# Altium PCB 20K Control Board V1.1.PcbDoc (part 9 of 24)
Units mm, origin at the board's own origin, x right, y up, seen from the top; angles counter-clockwise.
Board outline 132 x 260 mm, 4 copper layers (Top Layer, GND, VCC, Bottom Layer); 1384 components, 779 nets, 4515 pads, 1774 vias.
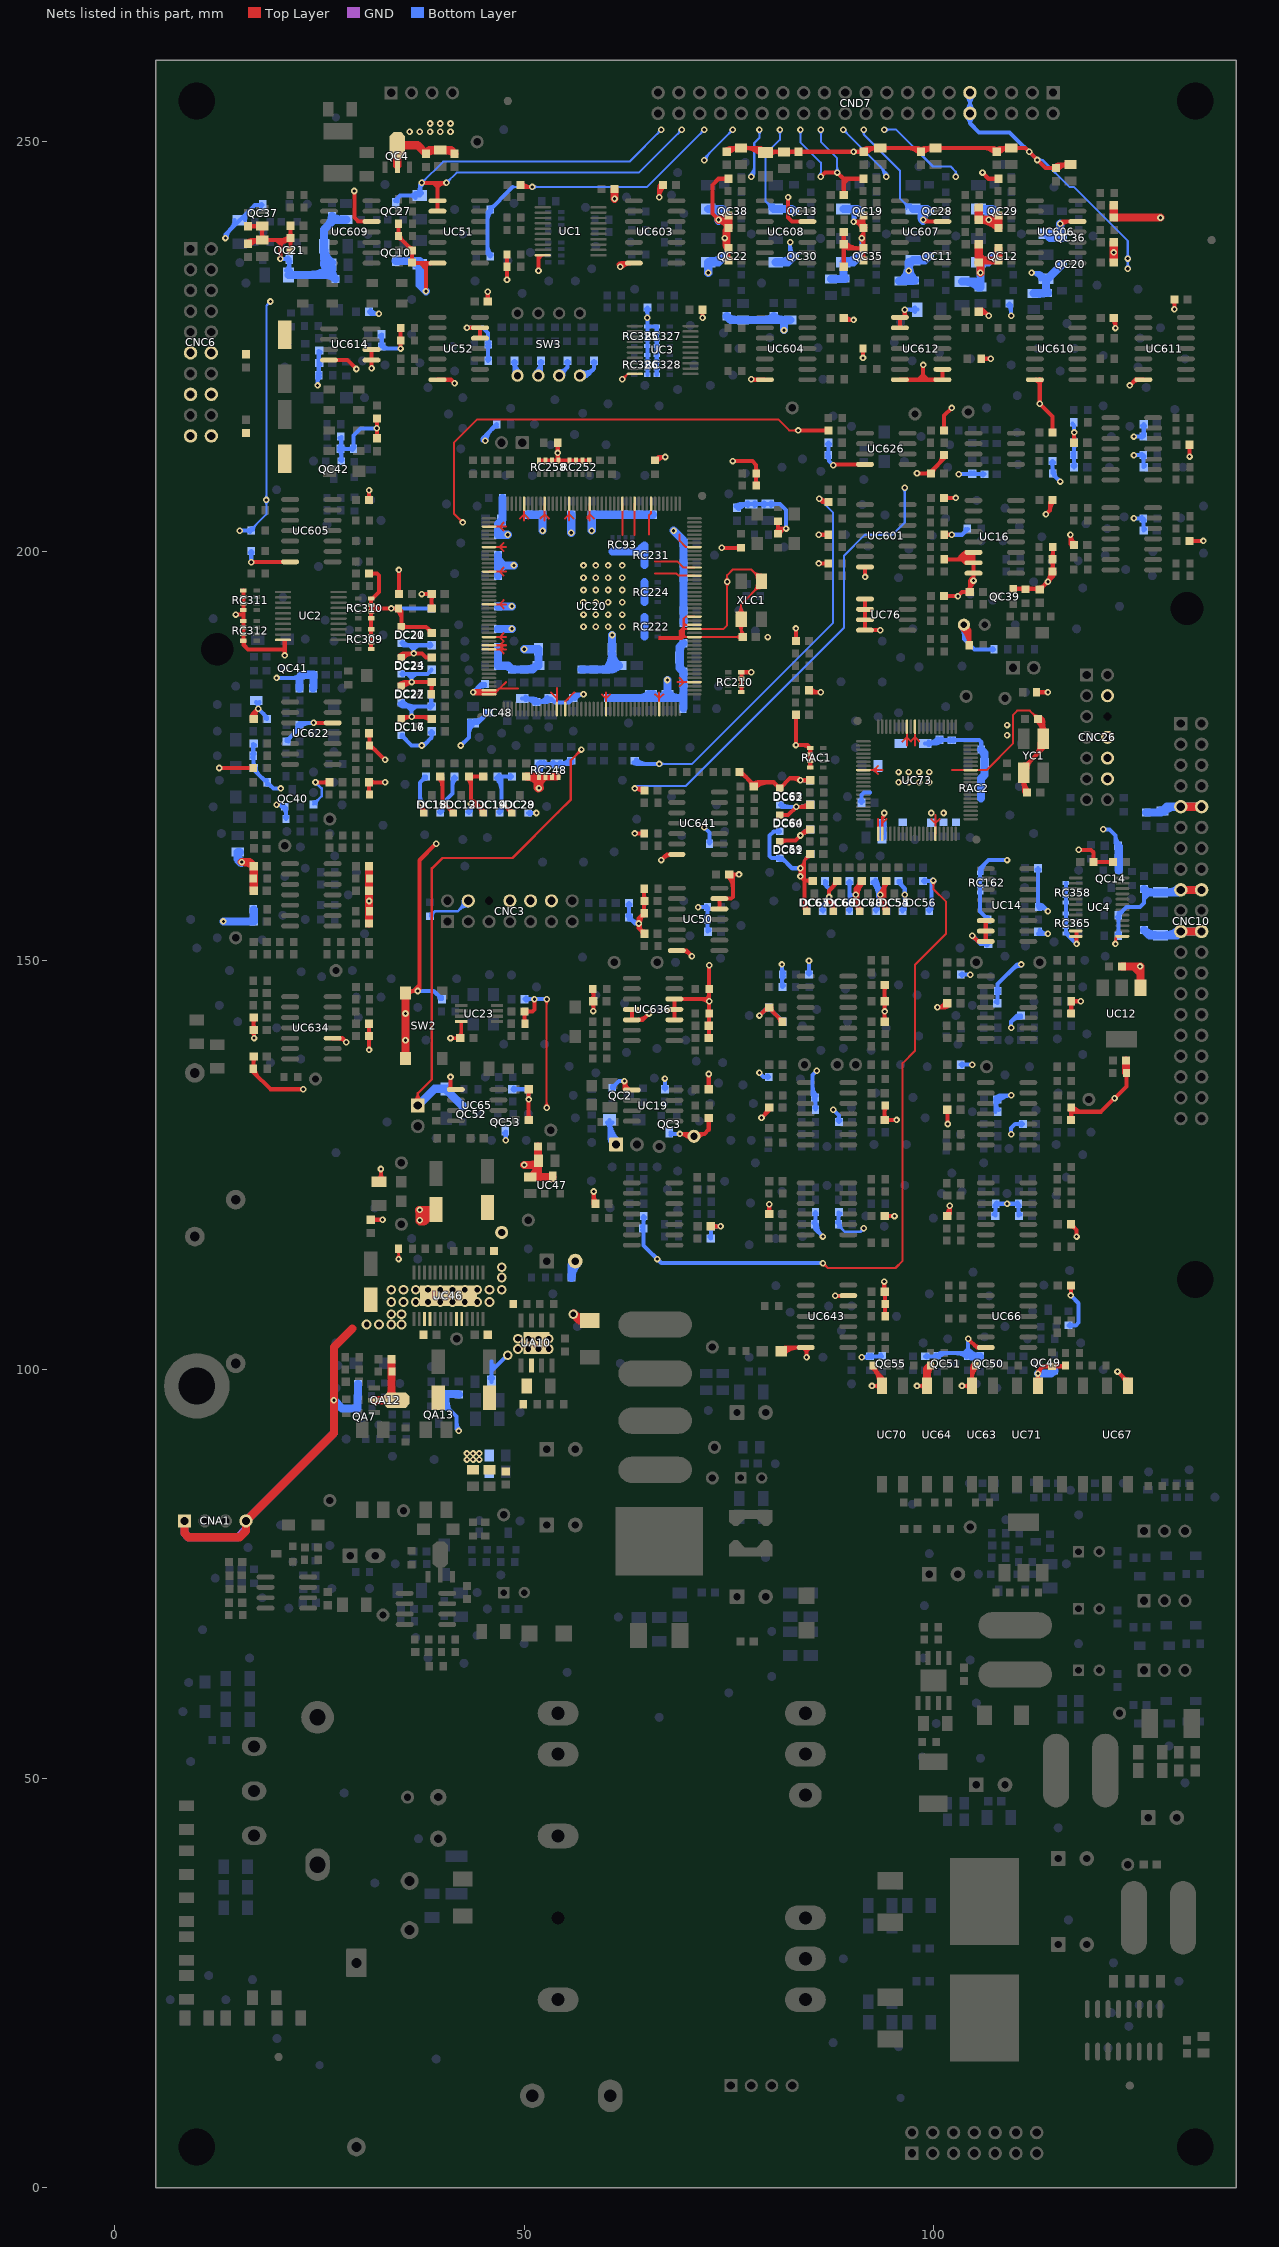
[diagram p11: the nets of this part, all layers, seen from the top]

## Via types
v1: diameter 0.8, hole 0.4, Top Layer to Bottom Layer, tented both sides, 1354 vias
v2: diameter 1.2, hole 0.7, Top Layer to Bottom Layer, 261 vias
v3: diameter 0.8, hole 0.4, Top Layer to Bottom Layer, 58 vias
v4: diameter 1.2, hole 0.7, Top Layer to Bottom Layer, tented top, 58 vias
v5: diameter 0.8, hole 0.4, Top Layer to Bottom Layer, tented top, 22 vias
v6: diameter 1.2, hole 0.7, Top Layer to Bottom Layer, tented both sides, 13 vias
v7: diameter 1.2, hole 0.7, Top Layer to Bottom Layer, tented bottom, 8 vias

## Nets (pads, with @x,y where several pads share a name; then routed paths per layer and width w, separated by ;. In a path a pad name is that pad's centre, name@x,y a point inside that pad or via, vN(x,y) a via of type N, cw(c..) or ccw(c..) an arc to the next point about the centre after c; other vN are vias at no path point) (continued)
GND: (continued)
  Bottom Layer w0.25: RC679.1@16.65,202.5 16.65,202.65 18.5,204.5 18.5,230 v1(19,230.5) ; RC679.1@16.65,202.875 ccw(c16.65,203.418) 17.034,203.034 ; RC679.1@16.975,202.55 cw(c18.001,202.55) 17.276,203.276 ; v1@18.306,206.056 cw(c17.836,205.586) 18.5,205.586 cw(c19.164,205.586) v1@18.694,206.056 ; v1@18.306,206.444 ccw(c17.836,206.914) 18.5,206.914 ccw(c19.164,206.914) v1@18.694,206.444 ; v1@18.725,230.5 cw(c18.061,230.5) 18.531,230.031 cw(c19,229.561) v1@19,230.225 ; v1(37.5,245) 40.1,247.6 62.873,247.6 66.75,251.477 v1(66.75,251.5) ; v1@37.5,245.275 ccw(c37.5,245.939) 37.969,245.469 ccw(c38.439,245) v1@37.775,245 ; v1(40.5,245) 41.75,246.25 64.023,246.25 69.25,251.477 v1(69.25,251.5) ; v1@40.5,245.275 ccw(c40.5,245.939) 40.969,245.469 ccw(c41.439,245) v1@40.775,245 ; 48.6,244.5 65.023,244.5 72,251.477 v1(72,251.5) ; v1@50.806,244.306 ccw(c50.336,243.836) 50.336,244.5 ccw(c50.336,245.164) v1@50.806,244.694 ; v1@51.194,244.306 cw(c51.664,243.836) 51.664,244.5 cw(c51.664,245.164) v1@51.194,244.694 ; RC259.1@63.426,174.276 ccw(c64.093,174.943) 64.093,174 ; v1(63.5,171) 63.8,171.3 69.734,171.3 ; RC259.1@63.5,174.4 63.9,174 70.525,174 87.75,191.225 87.75,204.7 v1(86.05,206.4) ; v1@63.518,170.982 cw(c64.285,170.215) 64.285,171.3 ; RC259.1@63.603,174.453 ccw(c64.697,175.547) 64.697,174 ; v1@63.694,170.806 cw(c64.888,169.612) 64.888,171.3 ; RC259.1@63.78,174.63 ccw(c65.3,176.15) 65.3,174 ; 66.264,250.992 ccw(c65.756,251.5) v1@66.475,251.5 ; v1@66.306,173.806 ccw(c65.836,173.336) 65.836,174 ccw(c65.836,174.664) v1@66.306,174.194 ; 66.319,251.047 cw(c66.75,250.616) v1@66.75,251.225 ; v1@66.694,173.806 cw(c67.164,173.336) 67.164,174 cw(c67.164,174.664) v1@66.694,174.194 ; 68.764,250.992 ccw(c68.256,251.5) v1@68.975,251.5 ; 68.819,251.047 cw(c69.25,250.616) v1@69.25,251.225 ; 70.217,171.783 69.734,171.3 ; 71.514,250.992 ccw(c71.006,251.5) v1@71.725,251.5 ; 71.569,251.047 cw(c72,250.616) v1@72,251.225 ; v1(72,247.75) 72,248 v1(75.5,251.5) ; v1@72.025,247.75 cw(c72.689,247.75) 72.219,248.219 ; v1@72.275,247.75 cw(c73.542,247.75) 72.646,248.646 ; v1@75.225,251.5 cw(c74.561,251.5) 75.031,251.031 cw(c75.5,250.561) v1@75.5,251.225 ; v1@77.556,245.944 ccw(c76.209,247.291) 78.113,247.291 ; v1@77.732,245.768 ccw(c76.812,246.688) 78.113,246.688 ; v1(77.75,245.75) 78.113,246.113 78.113,249.863 78.75,250.5 v1(78.75,251.5) ; v1@77.909,245.591 ccw(c77.416,246.084) 78.113,246.084 ; v1@78.556,251.306 cw(c78.086,250.836) 78.75,250.836 cw(c79.414,250.836) v1@78.944,251.306 ; 79.518,242.732 ccw(c80.5,243.713) RC357.1@80.5,242.325 ; 79.639,242.611 cw(c78.828,241.8) RC357.1@79.975,241.8 ; RC357.1@79.945,242.305 ccw(c80.5,242.86) RC357.1@80.5,242.075 ; RC357.1@80.45,241.8 79.463,242.787 79.463,248.463 81.25,250.25 v1(81.25,251.5) ; v1@81.056,251.306 cw(c80.586,250.836) 81.25,250.836 cw(c81.914,250.836) v1@81.444,251.306 ; v1@83.556,251.306 cw(c83.086,250.836) 83.75,250.836 cw(c84.414,250.836) v1@83.944,251.306 ; v1(83.75,251.5) 83.75,249.977 86.25,247.477 v1(86.25,245.75) 86.25,246.25 ; v1@86.05,206.125 cw(c86.05,205.461) 86.519,205.931 cw(c86.989,206.4) v1@86.325,206.4 ; v1@86.056,245.944 ccw(c85.586,246.414) 86.25,246.414 ccw(c86.914,246.414) v1@86.444,245.944 ; v1@86.056,251.306 cw(c85.586,250.836) 86.25,250.836 cw(c86.914,250.836) v1@86.444,251.306 ; v1@86.103,245.982 ccw(c85.933,246.25) 86.25,246.25 ; v1(86.25,251.5) 86.25,250 88.25,248 v1(88.25,246.25) v1@88.25,246.273 ; v1@86.397,245.982 cw(c86.567,246.25) 86.25,246.25 ; v1@88.056,246.444 ccw(c87.586,246.914) 88.25,246.914 ccw(c88.914,246.914) v1@88.444,246.444 ; v1@89,251.225 cw(c89,250.561) 89.469,251.031 cw(c89.939,251.5) v1@89.275,251.5 ; v1(89,251.5) 94.25,246.25 ; v1@91.323,251.29 cw(c91.003,250.909) 91.5,250.909 ; v1(91.5,251.5) 91.5,250.909 ; v1@91.677,251.29 ccw(c91.997,250.909) 91.5,250.909 ; 93.427,247.073 cw(c92.104,245.75) v1@93.975,245.75 ; 93.854,246.646 cw(c92.958,245.75) v1@94.225,245.75 ; v1(94,251.5) 94.5,251.5 ; v1@94.103,245.982 ccw(c93.933,246.25) 94.25,246.25 ; v1(94.25,245.75) 94.25,246.25 ; 94.281,246.219 cw(c93.811,245.75) v1@94.475,245.75 ; v1@94.397,245.982 cw(c94.567,246.25) 94.25,246.25 ; 94.727,251.5 94.5,251.5 ; 95.9,245.75 95.9,246.509 ; 96.268,242.732 ccw(c97.25,243.713) RC376.1@97.25,242.325 ; v1@96.306,207.556 cw(c95.836,207.086) 96.5,207.086 cw(c97.164,207.086) v1@96.694,207.556 ; 96.389,242.611 cw(c95.578,241.8) RC376.1@96.725,241.8 ; v1(96.5,207.75) 96.5,203.5 95,202 91.636,202 89.1,199.464 89.1,190.666 69.734,171.3 ; RC376.1@96.695,242.305 ccw(c97.25,242.86) RC376.1@97.25,242.075 ; RC376.1@97.2,241.8 95.9,243.1 95.9,246.509 ; v1@102.567,245.955 ccw(c102.203,246.364) 102.75,246.364 ; v1(102.75,245.75) 102.75,246.364 ; v1@102.933,245.955 cw(c103.297,246.364) 102.75,246.364 ; v1(112.707,247.793) 113.328,247.793 ; v1@112.911,247.608 cw(c113.328,247.229) 113.328,247.793 ; v1@112.911,247.977 ccw(c113.328,248.356) 113.328,247.793 ; v1@123.556,234.694 ccw(c123.086,235.164) 123.75,235.164 ccw(c124.414,235.164) v1@123.944,234.694 ; v1@123.556,235.556 cw(c123.086,235.086) 123.75,235.086 cw(c124.414,235.086) v1@123.944,235.556 ; v1@123.556,235.944 ccw(c123.086,236.414) 123.75,236.414 ccw(c124.414,236.414) v1@123.944,235.944 ; v1(123.75,234.5) 123.75,237.909 117.159,244.5 116.621,244.5 113.328,247.793 ; 91.5,250.909 95.9,246.509 ; v1@94.232,251.353 cw(c94.5,251.183) 94.5,251.5 ; v1@94.232,251.353 cw(c94.5,251.183) 94.5,251.5 ; v1@94.232,251.353 cw(c94.5,251.183) 94.5,251.5 ; v1@94.232,251.647 ccw(c94.5,251.817) 94.5,251.5 ; v1@94.232,251.647 ccw(c94.5,251.817) 94.5,251.5 ; v1@94.232,251.647 ccw(c94.5,251.817) 94.5,251.5 ; 94.5,251.5 95.454,251.5 99.954,247 102.114,247 102.75,246.364 ; 94.664,251.5 ccw(c94.664,250.836) 94.194,251.306 cw(c94.664,250.836) 94.664,251.5 ; 94.664,251.5 cw(c94.664,252.164) 94.194,251.694 ccw(c94.664,252.164) 94.664,251.5
  Bottom Layer w0.3: CC344.2@24.25,169.05 25.25,170.05 25.25,171 v1(24.5,171.75) ; CC344.2@24.25,169.4 ccw(c24.25,170.245) 24.847,169.647 ccw(c25.445,169.05) CC344.2@24.6,169.05 ; v1@24.5,171.5 cw(c24.5,170.896) 24.927,171.323 cw(c25.354,171.75) v1@24.75,171.75 ; RC283.1@38.5,155.4 39.1,156 41.9,156 CNC3.4@43.17,157.27 ; RC283.1@38.55,155.7 ccw(c38.55,156.304) 38.977,155.877 ; RC283.1@38.85,155.4 cw(c39.695,155.4) 39.097,155.997 ; CNC3.4@42.52,157.27 cw(c40.951,157.27) 42.06,156.16 cw(c43.17,155.051) CNC3.4@43.17,156.62 ; CNC3.4@42.82,157.27 cw(c41.975,157.27) 42.573,156.673 cw(c43.17,156.075) CNC3.4@43.17,156.92 ; RC179.1@88.4,117.4 cw(c88.4,116.917) RC179.1@88.741,117.259 ; RC179.1@88.4,117.75 88.4,117.6 89.175,116.825 91.075,116.825 ; RC179.1@88.7,117.7 ccw(c89.666,117.7) 88.983,117.017 ; v1@91.25,117.249 cw(c90.653,117.247) 91.075,116.825 ; v1@91.499,117 ccw(c91.497,116.403) 91.075,116.825 ; v1(91.5,117.25) 91.075,116.825
  Bottom Layer w0.4: v1(83.75,161.25) 84.25,161.75 84.25,162.25 84.95,162.95 CC408.1@84.95,163 ; v1@83.75,161.45 ccw(c83.75,161.933) 84.091,161.591 ccw(c84.433,161.25) v1@83.95,161.25 ; 84.403,162.403 ccw(c83.805,163) CC408.1@84.65,163 ; CC408.1@84.523,162.523 cw(c84.95,162.096) CC408.1@84.95,162.7
  Bottom Layer w0.5: v1(13.5,238.25) 13.5,238.7 RC390.1@15.25,240.45 17.082,242.282 QC37.3@18.035,242.282 ; v1@13.65,238.25 cw(c15.099,238.25) 14.074,239.274 ; 14.14,239.34 ccw(c13.031,240.45) RC390.1@14.6,240.45 ; v1(15.25,202.5) RC679.1@16.65,202.5 ; RC390.1@15.9,240.45 cw(c17.469,240.45) 16.36,241.56 ; RC673.1@16.509,199.809 cw(c16.167,199.467) 16.65,199.467 cw(c17.133,199.467) RC673.1@16.791,199.809 ; RC679.1@16.509,202.359 ccw(c16.167,202.017) 16.167,202.5 ccw(c16.167,202.983) RC679.1@16.509,202.641 ; v1(16.65,198.65) RC673.1@16.65,200 ; RC446.1@16.759,174.809 cw(c16.296,174.346) 16.95,174.346 ; RC446.1@16.759,175.191 ccw(c16.417,175.533) 16.9,175.533 ccw(c17.383,175.533) RC446.1@17.041,175.191 ; CC265.1@16.773,173.677 ccw(c16.346,174.104) 16.95,174.104 ccw(c17.554,174.104) CC265.1@17.127,173.677 ; RC446.1@16.9,175 CC266.1@16.9,176.45 ; 16.9,175.776 cw(c17.674,175.776) CC266.1@17.127,176.323 ; RC446.1@16.95,174.95 16.95,173.3 18.25,172 RC463.1@18.45,172 ; CC265.1@17.2,173.5 ccw(c18.286,173.5) 17.518,172.732 ; CC272.1@17.238,181.538 cw(c16.605,180.905) v1@17.5,180.905 ; v1@17.5,181.146 cw(c18.054,181.146) CC272.1@17.662,181.538 ; CC272.1@17.5,181.5 v1(17.5,180.75) 18.6,179.65 RC464.1@18.6,179.5 ; QC37.3@17.888,242.135 ccw(c17.535,241.782) 17.535,242.282 ccw(c17.535,242.782) QC37.3@17.888,242.429 ; 18.003,172.247 ccw(c18.6,172.845) RC463.1@18.6,172 ; 18.188,180.062 cw(c17.676,179.55) RC464.1@18.4,179.55 ; RC463.1@18.6,171.5 cw(c18.6,170.896) RC463.1@19.027,171.323 ; RC463.1@18.6,171.75 19.35,171 v1(20.25,171) ; v1(19.75,184.5) 22.5,184.5 QC41.1@22.75,184.75 ; v1(20.218,235.718) QC21.3@21.31,235.718 21.31,233.75 RC369.1@21.31,233.61 ; QC40.1@20.593,168.614 ccw(c19.75,167.885) v1(19.75,169) 20.5,169 20.9,168.6 RC466.1@20.9,167.25 ; QC40.1@20.603,168.603 cw(c19.888,167.888) 20.9,167.888 ; RC466.1@20.759,167.441 ccw(c20.417,167.783) 20.9,167.783 ccw(c21.383,167.783) RC466.1@21.041,167.441 ; RC369.1@20.917,234.283 ccw(c19.968,235.232) QC21.3@21.31,235.232 ; CC347.1@20.95,176.786 22.55,178.386 22.55,179 v1@24.27,179 ; CC347.1@20.95,177 ccw(c20.95,177.516) CC347.1@21.315,177.151 ; QC21.3@21.164,235.394 cw(c20.81,235.04) 21.31,235.04 cw(c21.81,235.04) QC21.3@21.457,235.394 ; QC21.3@21.164,235.571 ccw(c20.81,235.218) 20.81,235.718 ccw(c20.81,236.218) QC21.3@21.164,235.865 ; CC347.1@21.2,176.75 cw(c21.891,176.75) CC347.1@21.403,177.239 ; 21.31,234.7 ccw(c21.9,234.7) RC369.1@21.483,234.283 ; 21.646,184.5 ccw(c21.646,185.854) QC41.1@22.603,184.897 ; 21.866,177.703 ccw(c20.819,178.75) CC268.2@22.3,178.75 ; CC268.2@22.727,178.573 cw(c23.757,177.543) 23.757,179 ; 23.86,179 ccw(c23.86,179.43) v1@24.164,179.126 ; v1(24.75,220.25) RC345.2@24.75,221.4 ; v1@24.75,220.605 cw(c25.745,220.605) RC345.2@25.041,221.309 ; RC345.2@24.759,221.691 ccw(c24.417,222.033) 24.9,222.033 ccw(c25.383,222.033) RC345.2@25.041,221.691 ; RC345.2@24.9,221.5 CC198.1@24.9,224.45 ; 24.9,222.276 cw(c25.674,222.276) CC200.1@25.127,222.823 ; 24.9,223.724 ccw(c25.674,223.724) CC200.1@25.127,223.177 ; 24.9,223.776 cw(c25.674,223.776) CC198.1@25.127,224.323 ; CC286.1@27.373,212.323 cw(c26.693,211.643) 27.655,211.643 ; CC286.1@27.373,212.677 ccw(c26.693,213.357) 27.655,213.357 ; RC492.1@27.459,213.809 cw(c26.984,213.334) 27.655,213.334 ; QC42.2@27.508,211.147 ccw(c27.155,211.5) 27.655,211.5 ccw(c28.155,211.5) QC42.2@27.802,211.147 ; QC42.2@27.655,211 CC286.1@27.655,212.5 ; RC492.1@27.655,213.945 CC286.1@27.655,212.5 ; CC286.1@27.727,212.323 cw(c28.154,211.896) 28.154,212.5 cw(c28.154,213.104) CC286.1@27.727,212.677 ; RC498.1@29.009,212.359 ccw(c28.667,212.017) 28.667,212.5 ccw(c28.667,212.983) RC498.1@29.009,212.641 ; RC498.1@29.009,212.691 ccw(c28.667,213.033) 29.15,213.033 ccw(c29.633,213.033) RC498.1@29.291,212.691 ; CC202.1@31.05,229.25 31.3,229 v1(32.25,229) cw(c32.25,230.44) CC202.1@31.228,229.426 ; v1(32,215) 30,215 29.15,214.15 RC498.1@29.15,212.5 CC286.1@27.655,212.5 ; CC196.2@32.373,226.323 cw(c31.826,225.776) 32.6,225.776 ; RC330.1@32.459,225.191 ccw(c32.117,225.533) 32.6,225.533 ccw(c33.083,225.533) RC330.1@32.741,225.191 ; RC330.1@32.6,225 CC196.2@32.6,226.45 ; RC330.1@32.741,225.091 ccw(c33.566,225.916) 33.566,224.75 ; RC330.1@32.85,224.75 v1(34.9,224.75) ; v1(33.75,193) RC227.2@38.65,193 ; QC27.3@34.2,242.81 34.84,243.45 RC379.1@37.25,243.45 37.25,244.75 v1(37.5,245) ; QC27.3@34.492,242.71 cw(c35.439,242.71) 34.769,243.379 ; DC22.1@34.749,181.349 ccw(c35.366,181.72) 35.366,181 ; DC22.1@34.793,181.293 ccw(c35.5,182) 35.5,181 ; DC16.1@35,177.293 cw(c35,176.793) 35.354,177.146 cw(c35.707,177.5) DC16.1@35.207,177.5 ; DC16.1@35,177.5 36.25,176.25 37.75,176.25 38.7,177.2 CC144.1@38.7,178 ; DC22.1@35,181.5 35.5,181 ; DC23.1@35,185 38.2,185 CC156.1@38.7,185.5 ; DC21.1@35,188.75 35.25,188.5 CC153.1@38.7,188.5 ; DC22.1@35.147,181.647 ccw(c36.707,183.207) 36.707,181 ; DC23.1@35.147,184.853 cw(c35.5,184.5) 35.5,185 cw(c35.5,185.5) DC23.1@35.147,185.147 ; DC21.1@35.147,188.897 ccw(c36.104,189.854) 36.104,188.5 ; DC22.1@35.178,181.607 ccw(c36.25,182.251) 36.25,181 ; 35.75,181 36.25,180.5 ; 35.75,185 36.25,184.5 ; 36,188.5 36.5,188 ; v1(36.25,179.75) 36.25,180.5 ; v1(36.25,184) 36.25,184.5 ; 36.25,185 36.25,184.5 ; v1(36.5,187.5) 36.5,188 ; 36.5,188.5 36.5,188 ; RC379.1@36.717,243.167 ccw(c36.034,242.484) 36.034,243.45 ccw(c36.034,244.416) RC379.1@36.717,243.733 ; 36.75,181 36.25,180.5 ; 36.75,185 36.25,184.5 ; RC379.1@36.967,243.733 ccw(c36.284,244.416) 37.25,244.416 ccw(c38.216,244.416) RC379.1@37.533,243.733 ; v1(37,146.25) 38.95,146.25 CC170.1@39.95,145.25 ; 37,188.5 36.5,188 ; 37.25,170.121 ccw(c38.466,170.121) v1@37.606,169.261 ; RC379.1@37.25,244.034 cw(c38.466,244.034) v1@37.606,244.894 ; v1(37.5,169.155) 37.25,169.405 37.25,171.7 CC145.1@38,172.45 ; v1@37.5,176.4 ccw(c37.5,177.366) 38.183,176.683 ; v1(37.5,194.75) CC136.1@38.7,194.75 ; CC145.1@37.75,172.45 cw(c37.146,172.45) 37.573,172.023 cw(c38,171.596) CC145.1@38,172.2 ; RC235.1@38.509,182.309 cw(c38.167,181.967) 38.65,181.967 cw(c39.133,181.967) RC235.1@38.791,182.309 ; RC227.2@38.509,192.859 ccw(c38.167,192.517) 38.167,193 ccw(c38.167,193.483) RC227.2@38.509,193.141 ; CC144.1@38.523,177.823 cw(c38.096,177.396) 38.7,177.396 cw(c39.304,177.396) CC144.1@38.877,177.823 ; CC165.1@38.523,180.823 ccw(c38.096,180.396) 38.096,181 ccw(c38.096,181.604) CC165.1@38.523,181.177 ; CC153.1@38.523,188.323 ccw(c38.096,187.896) 38.096,188.5 ccw(c38.096,189.104) CC153.1@38.523,188.677 ; CC136.1@38.523,194.573 ccw(c38.096,194.146) 38.096,194.75 ccw(c38.096,195.354) CC136.1@38.523,194.927 ; 38.65,181.724 ccw(c39.424,181.724) CC165.1@38.877,181.177 ; RC235.1@38.65,182.5 38.65,181.05 CC165.1@38.7,181 35.5,181 ; DC18.1@39.603,168.147 ccw(c38.646,169.104) v1@40,169.104 ; CC170.1@39.7,145.25 ccw(c39.096,145.25) 39.523,145.677 ccw(c39.95,146.104) CC170.1@39.95,145.5 ; DC18.1@39.75,168 40,168.25 v1(40,169.155) 41.25,170.405 41.25,172.2 CC132.1@41.5,172.45 ; QA13.1@40.5,95.293 cw(c40.5,94.793) 40.854,95.146 cw(c41.207,95.5) QA13.1@40.707,95.5 ; QA13.1@40.5,95.5 41.75,94.25 41.75,92.75 v1(42,92.5) ; 41.25,171.243 cw(c42.707,171.243) CC132.1@41.677,172.273 ; 41.75,93.466 ccw(c42.966,93.466) v1@42.106,92.606 ; v1(42.25,176.25) 43.25,177.25 43.25,179 44.325,179 UC48.3@45.575,180.25 ; v1(43,227.29) 44.96,227.29 45.6,226.65 RC28.2@45.6,225.25 RC531.1@45.6,223.25 ; DC13.1@43.103,168.147 ccw(c42.146,169.104) v1@43.5,169.104 ; DC13.1@43.25,168 43.5,168.25 v1(43.5,169.155) ; 43.25,177.551 cw(c44.999,177.551) CC302.2@43.762,178.788 ; CC302.2@43.25,179.25 CC302.2@43.5,179.25 ; v1(43.75,182.75) 44.75,183.75 CC159.1@45.2,183.75 ; CC302.2@43.95,179.3 ccw(c43.95,180.93) 45.102,179.777 ; v1@44.005,183.005 cw(c45.2,181.81) CC159.1@45.2,183.5 ; v1@44.9,213.5 cw(c45.504,213.5) 45.077,213.927 ; 44.918,179.593 ccw(c44.261,180.25) UC48.3@45.19,180.25 ; v1(45.25,213.5) 45.25,214.1 RC207.1@46.65,215.5 ; v1@45.4,213.5 cw(c47.211,213.5) 45.93,214.78 ; RC531.1@45.459,223.441 ccw(c45.117,223.783) 45.6,223.783 ; RC28.2@45.459,225.059 cw(c45.117,224.717) 45.6,224.717 cw(c46.083,224.717) RC28.2@45.741,225.059 ; RC28.2@45.459,225.441 ccw(c45.117,225.783) 45.6,225.783 ccw(c46.083,225.783) RC28.2@45.741,225.441 ; 45.5,237.378 ccw(c47.178,237.378) RC528.1@45.991,236.191 ; 45.5,240.372 cw(c47.178,240.372) RC527.1@45.991,241.559 ; 45.6,223.783 ccw(c46.083,223.783) RC531.1@45.741,223.441 ; CA121.1@45.788,98.912 ccw(c45.276,99.424) 46,99.424 ccw(c46.724,99.424) CA121.1@46.212,98.912 ; RC528.1@45.85,236 45.5,236.35 45.5,241.4 48.6,244.5 ; RC527.1@45.85,242 ccw(c45.85,242.604) RC527.1@46.277,242.177 ; CA121.1@46,98.5 46,99.8 ; 46,101 46,100.25 ; RC207.1@46.223,215.073 cw(c46.65,214.646) RC207.1@46.65,215.25 ; 46.25,100.5 46,100.25 ; CC149.1@46.573,172.273 cw(c44.939,170.639) 47.25,170.639 ; CC149.1@46.75,172.45 CC167.1@48.5,172.45 ; DC14.1@46.853,168.147 ccw(c45.896,169.104) v1@47.25,169.104 ; CC149.1@46.927,172.273 cw(c47.354,171.846) 47.354,172.45 cw(c47.354,173.054) 46.927,172.627 cw(c46.146,171.846) 47.25,171.846 ; DC14.1@47,168 47.25,168.25 v1(47.25,169.155) CC149.1@47.25,172.45 ; QC53.3@47.569,128.894 cw(c47.131,128.456) 47.75,128.456 ; v1(47.75,128) QC53.3@47.75,129.067 ; v4(48,101.75) 47.95,101.75 46,99.8 ; CC167.1@48.323,172.273 ccw(c47.896,171.846) 47.896,172.45 ccw(c47.896,173.054) CC167.1@48.323,172.627 ; CC398.2@48.55,134.25 50,134.25 50.55,133.7 v1(50.55,133) ; CC174.1@48.623,223.073 cw(c48.196,222.646) 48.8,222.646 cw(c49.404,222.646) CC174.1@48.977,223.073 ; CC398.2@48.727,134.073 cw(c49.154,133.646) 49.154,134.25 cw(c49.154,134.854) CC398.2@48.727,134.427 ; SW3.1@48.8,221.83 CC174.1@48.8,223.25 ccw(c50.585,223.25) SW3.1@49.495,221.836 ; 48.8,222.233 ccw(c49.801,222.233) SW3.1@49.19,221.44 ; CC138.1@49.75,182 51.05,182 CC301.2@51.5,181.55 ; CC138.1@49.81,182 cw(c49.81,179.86) CC301.2@51.323,181.373 ; CC169.1@50.05,145.25 v1(52.75,145.25) ; CC138.1@50.162,181.788 cw(c50.674,181.276) 50.674,182 cw(c50.674,182.724) CC138.1@50.162,182.212 ; CC169.1@50.227,145.073 cw(c50.654,144.646) 50.654,145.25 cw(c50.654,145.854) CC169.1@50.227,145.427 ; DC29.1@50.5,168 v1(51.5,168) ; DC29.1@50.647,167.853 cw(c51,167.5) 51,168 cw(c51,168.5) DC29.1@50.647,168.147 ; CC301.2@51.017,182 cw(c51.017,181.067) 51.677,181.727 ccw(c52.104,182.154) 52.104,181.55 ccw(c52.104,180.946) CC301.2@51.677,181.373 ; SW3.2@51.4,221.816 ccw(c50.143,223.25) CC173.1@52.05,223.25 52.05,221.76 SW3.2@51.73,221.44 ccw(c51.111,222.146) 52.05,222.146 ; CC173.1@51.873,223.073 cw(c51.446,222.646) 52.05,222.646 cw(c52.654,222.646) CC173.1@52.227,223.073 ; CC150.1@52.412,173.788 cw(c52.924,173.276) 52.924,174 cw(c52.924,174.724) CC150.1@52.412,174.212 ; CC147.1@52.533,181.55 ccw(c52.533,182.409) CC147.1@53.207,181.876 ; 52.75,174 55.5,174 RC247.1@55.9,174.4 ; CC147.1@52.75,182 CC147.1@53.25,182 ; CC147.1@52.815,182.186 cw(c51.5,183.227) CC301.2@51.5,181.55 ; CC151.1@53.588,173.788 ccw(c53.076,173.276) 53.076,174 ccw(c53.076,174.724) CC151.1@53.588,174.212 ; CC151.1@54.251,174 ccw(c54.251,175.849) RC247.1@55.559,174.541 ; SW3.3@54.27,221.44 55.3,222.47 CC172.1@55.3,223.25 ; SW3.3@54.27,221.94 ccw(c54.27,223.147) 55.124,222.294 ccw(c55.977,221.44) SW3.3@54.77,221.44 ; CC151.1@54.412,173.788 cw(c54.924,173.276) 54.924,174 cw(c54.924,174.724) CC151.1@54.412,174.212 ; CC172.1@55.123,223.073 cw(c54.696,222.646) 55.3,222.646 cw(c55.904,222.646) CC172.1@55.477,223.073 ; RC247.1@55.459,174 ccw(c55.459,174.641) RC247.1@55.912,174.188 ; CC121.2@55.787,182.181 cw(c56.357,181.831) CC121.2@56.357,182.5 ; CC121.2@56.213,181.919 cw(c57.25,181.284) v1(57.25,182.5) 56.45,182.5 CC121.2@56,182.05 55.45,181.5 53.75,181.5 CC147.1@53.25,182 ; SW3.4@56.963,221.916 ccw(c57.442,223.408) 58.55,222.3 ; SW3.4@57.24,221.184 cw(c57.69,220.916) 57.69,221.44 ; SW3.4@57.24,221.696 ccw(c57.69,221.964) 57.69,221.44 ; 57.971,221.721 cw(c57.16,222.531) SW3.4@56.81,221.44 57.69,221.44 ; CC171.1@58.373,223.073 cw(c57.946,222.646) 58.55,222.646 cw(c59.154,222.646) CC171.1@58.727,223.073 ; CC171.1@58.55,223.25 58.55,222.3 ; DC11.1@60.132,130.182 cw(c59.364,129.414) 60.45,129.414 cw(c61.536,129.414) DC11.1@60.768,130.182 ; CNC1.1@60.45,128.326 ccw(c61.938,128.326) CNC1.1@60.97,127.196 ; 60.45,129.413 ccw(c62.869,129.413) CNC1.1@61.295,127.576 ; QC2.2@60.75,134.405 61.595,135.25 v1(62.25,135.25) ; QC2.2@60.75,134.612 ccw(c60.75,135.112) 61.104,134.759 ccw(c61.457,134.405) QC2.2@60.957,134.405 ; CNC1.1@61.23,127.5 60.45,128.28 DC11.1@60.45,130.5 ccw(c63.801,130.5) CNC1.1@61.62,127.956 ; CC175.1@62.623,155.427 ccw(c62.196,155.854) 62.8,155.854 ccw(c63.404,155.854) CC175.1@62.977,155.427 ; CC176.1@62.623,156.823 cw(c62.196,156.396) 62.8,156.396 cw(c63.404,156.396) CC176.1@62.977,156.823 ; CC175.1@62.8,155 cw(c62.8,154.396) 63.227,154.823 cw(c63.654,155.25) CC175.1@63.05,155.25 ; CC176.1@62.8,157 CC175.1@62.8,155.25 63.55,154.5 v1(64,154.5) ; CC175.1@63.025,155.025 ccw(c63.934,155.934) v1@63.993,154.65 ; RC259.1@63.338,174.188 ccw(c63.791,174.641) RC259.1@63.791,174 ; RC259.1@63.691,174.541 ccw(c64.999,175.849) 64.999,174 ; RC259.1@63.9,174 v1(66.5,174) ; CC2.1@64.373,117.073 cw(c63.826,116.526) 64.6,116.526 ; CC2.1@64.373,117.427 ccw(c63.826,117.974) 64.6,117.974 ; RC5.2@64.459,118.559 cw(c64.117,118.217) 64.6,118.217 cw(c65.083,118.217) RC5.2@64.741,118.559 ; RC5.2@64.6,118.75 64.6,115.15 66.75,113 v1(86.5,113) ; CC185.2@64.873,229.573 cw(c64.446,229.146) 65.05,229.146 cw(c65.654,229.146) CC185.2@65.227,229.573 ; RC326.8@65.05,221.55 RC326.7@65.05,222.35 RC326.6@65.05,223.15 RC326.5@65.05,223.95 RC325.8@65.05,225.05 RC325.7@65.05,225.85 RC325.6@65.05,226.65 RC325.5@65.05,227.45 ; CC185.2@65.05,229.75 RC325.5@65.05,227.45 ; RC328.5@66.2,221.55 RC328.6@66.2,222.35 RC328.7@66.2,223.15 RC328.8@66.2,223.95 RC327.5@66.2,225.05 RC327.6@66.2,225.85 RC327.7@66.2,226.65 RC327.8@66.2,227.45 RC325.5@65.05,227.45 ; CC106.2@67.023,134.427 ccw(c66.596,134.854) 67.2,134.854 ccw(c67.804,134.854) CC106.2@67.377,134.427 ; CC106.2@67.2,134.25 v1(67.2,135.55) ; QC3.3@67.862,128.644 cw(c68.196,128.31) 68.196,128.782 ; QC3.3@67.862,128.937 ccw(c68.235,129.31) 68.235,128.782 ; QC3.3@67.965,128.968 68.151,128.782 v1(69.032,128.782) ; v1(71.25,156.5) RC43.1@72.4,156.5 CC48.2@72.4,153.55 ; v1(72,166.25) 72.65,165.6 RC686.1@72.65,164.25 ; RC535.1@72.259,154.809 cw(c71.917,154.467) 72.4,154.467 cw(c72.883,154.467) RC535.1@72.541,154.809 ; RC535.1@72.259,155.191 ccw(c71.917,155.533) 72.4,155.533 ccw(c72.883,155.533) RC535.1@72.541,155.191 ; RC43.1@72.259,156.309 cw(c71.917,155.967) 72.4,155.967 cw(c72.883,155.967) RC43.1@72.541,156.309 ; RC43.1@72.259,156.359 ccw(c71.917,156.017) 71.917,156.5 ccw(c71.917,156.983) RC43.1@72.259,156.641 ; 72.4,154.224 ccw(c73.174,154.224) CC48.2@72.627,153.677 ; RC686.1@72.509,164.441 ccw(c72.167,164.783) 72.65,164.783 ccw(c73.133,164.783) RC686.1@72.791,164.441 ; CC85.1@72.623,116.177 ccw(c72.076,116.724) 72.85,116.724 ; RC165.1@72.709,117.309 cw(c72.367,116.967) 72.85,116.967 cw(c73.333,116.967) RC165.1@72.991,117.309 ; CC85.1@72.8,116 72.85,116.05 RC165.1@72.85,117.5 v1(74,117.5) ; RC165.1@72.991,117.359 cw(c73.333,117.017) 73.333,117.5 cw(c73.333,117.983) RC165.1@72.991,117.641 ; CC249.1@75.823,205.477 cw(c76.483,204.817) CC249.1@76.483,205.75 ; CC249.1@76,205.3 76.45,205.75 CC248.1@79.75,205.75 81.25,205.75 82,205 v1(82,202.75) ; CC249.1@76.177,205.123 cw(c77.69,203.61) CC349.1@77.69,205.75 ; CC349.1@77.338,205.538 ccw(c76.826,205.026) 76.826,205.75 ccw(c76.826,206.474) CC349.1@77.338,205.962 ; CC349.1@78.162,205.538 cw(c78.674,205.026) 78.674,205.75 cw(c78.674,206.474) CC349.1@78.162,205.962 ; v1(78.75,136.25) 79.25,135.75 RC83.1@79.9,135.75 ; v1(78.75,143.25) RC150.1@79.75,144.25 ; 79.217,143.717 cw(c79.9,143.034) 79.9,144 cw(c79.9,143.517) 80.241,143.859 cw(c80.583,144.2) RC150.1@80.1,144.2 ; CC248.1@79.338,205.538 ccw(c78.826,205.026) 78.826,205.75 ccw(c78.826,206.474) CC248.1@79.338,205.962 ; RC83.1@79.759,135.609 ccw(c79.417,135.267) 79.417,135.75 ccw(c79.417,136.233) RC83.1@79.759,135.891 ; RC150.1@79.9,144.1 RC150.1@79.9,144.2 ; RC150.1@79.9,144.5 RC150.1@79.9,144.25 RC150.1@79.9,144.2 ; CC248.1@80.162,205.538 cw(c80.674,205.026) 80.674,205.75 cw(c80.674,206.474) CC248.1@80.162,205.962 ; DC61.1@81.103,162.353 ccw(c80.75,162) 80.75,162.5 ccw(c80.75,163) DC61.1@81.103,162.647 ; DC60.1@81.103,165.603 ccw(c80.75,165.25) 80.75,165.75 ccw(c80.75,166.25) DC60.1@81.103,165.897 ; RC144.2@81.173,142.927 ccw(c81.6,143.354) RC144.2@81.6,142.75 ; DC61.1@81.25,162.293 cw(c81.25,161.189) 82.03,161.97 ; DC60.1@81.25,165.75 80.5,165.75 80,165.25 80,162.75 80.25,162.5 DC61.1@81.25,162.5 81.5,162.5 82.75,161.25 v1(83.75,161.25) ; DC62.1@81.25,169 81.5,168.75 v1(83.25,168.75) 84.7,168.75 CC417.1@84.95,169 ; DC62.1@81.397,169.147 ccw(c82.354,170.104) 82.354,168.75 ; CC64.1@81.5,146.8 v1(81.5,149.5) ; 81.5,147.474 ccw(c82.274,147.474) CC64.1@81.727,146.927 ; 81.5,147.476 cw(c82.324,147.476) RC133.1@81.741,148.059 ; 81.5,149.024 ccw(c82.324,149.024) RC133.1@81.741,148.441 ; CC64.1@81.55,146.75 CC64.1@81.55,146.8 ; RC144.2@81.6,142.5 RC150.1@79.9,144.2 ; 82.25,242.253 v1(82.25,243.25) ; 82.5,237.236 ccw(c83.991,237.236) QC30.3@82.937,236.181 ; v1(82.5,237.75) 82.5,236.503 QC30.3@82.968,236.035 ; 83.743,168.75 ccw(c83.743,170.207) CC417.1@84.773,169.177 ; v1(83.75,165.25) 84.25,165.75 ; v1(83.75,172) RC693.2@84.9,172 ; v1@83.755,165.255 cw(c84.95,164.06) CC406.1@84.95,165.75 ; v1@84.025,165.525 cw(c84.659,164.891) CC406.1@84.887,165.758 ; CC57.1@84.623,148.427 ccw(c84.196,148.854) 84.8,148.854 ccw(c85.404,148.854) CC57.1@84.977,148.427 ; CC406.1@84.7,165.75 84.25,165.75 ; CC406.1@84.714,166.081 cw(c84.25,166.24) 84.25,165.75 ; RC693.2@84.759,171.859 ccw(c84.417,171.517) 84.417,172 ccw(c84.417,172.483) RC693.2@84.759,172.141 ; CC57.1@84.8,148.25 v1(84.8,149.95) ; 85.25,134.578 ccw(c86.878,134.578) CC54.2@85.727,133.427 ; CC38.1@85.373,117.927 ccw(c84.826,118.474) 85.6,118.474 ; CC54.2@85.373,133.073 cw(c84.826,132.526) 85.6,132.526 ; RC66.2@85.459,119.059 cw(c85.117,118.717) 85.6,118.717 cw(c86.083,118.717) RC66.2@85.741,119.059 ; RC101.2@85.459,131.941 ccw(c85.117,132.283) 85.6,132.283 ccw(c86.083,132.283) RC101.2@85.741,131.941 ; CC38.1@85.55,117.75 85.55,117.2 v1(86.5,116.25) ; CC54.2@85.55,133.25 85.25,133.55 85.25,136 v1(85.75,136.5) ; CC38.1@85.6,117.8 RC66.2@85.6,119.25 ; RC101.2@85.6,131.75 CC54.2@85.6,133.2 ; CC38.1@85.799,117.724 ccw(c87.273,117.573) v1@86.225,116.525 ; DC65.1@86.353,156.147 ccw(c86,156.5) 86.5,156.5 ccw(c87,156.5) DC65.1@86.647,156.147 ; DC65.1@86.5,156 86.5,156.75 87.25,157.5 87.25,158.75 86.75,159.25 CC422.1@86.75,159.7 ; 86.817,157.067 ccw(c86.134,157.75) v1@87.1,157.75 ; CC422.1@86.961,159.565 ccw(c87.36,159.31) 87.025,158.975 ; RC124.2@87.009,211.941 ccw(c86.546,212.404) 87.2,212.404 ; RC124.2@87.011,211.556 cw(c86.467,210.993) 87.25,210.993 ; CC65.1@87.023,213.073 cw(c86.596,212.646) 87.2,212.646 cw(c87.804,212.646) CC65.1@87.377,213.073 ; RC124.2@87.15,211.75 87.25,211.65 87.25,211 v1(87.75,210.5) ; RC124.2@87.2,211.8 CC65.1@87.2,213.25 ; v1(87.75,131.75) 88.45,131.05 CC68.2@88.45,130.25 ; RC179.1@88.259,117.941 ccw(c87.917,118.283) 88.4,118.283 ccw(c88.883,118.283) RC179.1@88.541,117.941 ; CC68.2@88.273,130.427 ccw(c87.846,130.854) 88.45,130.854 ccw(c89.054,130.854) CC68.2@88.627,130.427 ; RC179.1@88.4,117.75 CC96.1@88.4,119.2 ; 88.4,118.526 cw(c89.174,118.526) CC96.1@88.627,119.073 ; CC428.1@89.573,159.523 cw(c89.146,159.096) 89.75,159.096 cw(c90.354,159.096) CC428.1@89.927,159.523 ; DC69.1@89.603,156.147 ccw(c89.25,156.5) 89.75,156.5 ccw(c90.25,156.5) DC69.1@89.897,156.147 ; DC69.1@89.75,156 CC428.1@89.75,159.7 ; 89.75,158 v1(90.5,158) ; v1@90.25,240.141 cw(c91.716,240.141) QC19.3@90.905,241.362 ; v1(90.25,240.25) 90.25,241.347 ; 90.25,241.073 cw(c91.097,241.073) QC19.3@90.628,241.779 ; QC35.3@90.999,236.181 ccw(c90.394,236.787) 91.25,236.787 ; CC437.2@91.023,169.427 ccw(c90.596,169.854) 91.2,169.854 ccw(c91.804,169.854) CC437.2@91.377,169.427 ; CC437.2@91.2,169.25 91.2,170.2 91.5,170.5 92.25,170.5 ; v1(91.25,101.5) RC652.1@92.15,101.5 ; QC35.3@91.25,236.317 v1(91.25,238.25) ; v1@91.476,101.5 ccw(c91.476,102.324) RC652.1@92.059,101.741 ; RC652.1@92.25,101.6 QC55.2@93.695,101.6 ; RC652.1@92.441,101.459 cw(c92.783,101.117) 92.783,101.6 cw(c92.783,102.083) RC652.1@92.441,101.741 ; CC429.1@92.573,159.523 cw(c90.939,157.889) v1@93.25,157.889 ; CC429.1@92.65,159.6 93.25,159 ; CC429.1@92.716,159.452 cw(c92.632,158.84) 93.25,158.84 ; DC70.1@92.853,156.147 ccw(c91.896,157.104) 93.25,157.104 ; CC429.1@92.927,159.877 cw(c92.146,159.096) 93.25,159.096 ; DC70.1@93,156 93.25,156.25 93.25,159 ; CC429.1@93,159.7 ccw(c94.086,159.7) 93.318,158.932 ; 93.117,101.6 ccw(c93.117,102.288) QC55.2@93.603,101.802 ; 93.25,157 93.5,157.25 v1(93.5,158) 93.5,158.75 93.25,159 ; 93.25,157.034 cw(c94.466,157.034) v1@93.606,157.894 ; 93.25,158.966 ccw(c94.466,158.966) v1@93.606,158.106 ; CC395.1@95.75,159.7 95.75,159.5 96.5,158.75 96.5,156.25 DC55.1@96.25,156 ; CC395.1@96,159.7 ccw(c97.086,159.7) 96.318,158.932 ; DC55.1@96.103,156.147 ccw(c95.146,157.104) 96.5,157.104 ; v1(96.5,229.5) CC207.2@98.05,229.5 ; CC207.2@97.767,229.217 ccw(c97.084,228.534) 97.084,229.5 ccw(c97.084,230.466) CC207.2@97.767,229.783 ; CC399.1@98.75,159.7 v1@99.95,159.7 ; CC399.1@98.927,159.523 cw(c99.354,159.096) 99.354,159.7 cw(c99.354,160.304) CC399.1@98.927,159.877 ; RC613.1@99,101.6 QC51.2@100.445,101.6 ; CC445.1@99,176.5 100.3,176.5 CC424.1@100.75,176.95 ; CC445.1@99.06,176.5 ccw(c99.06,178.64) CC424.1@100.573,177.127 ; RC613.1@99.191,101.459 cw(c99.533,101.117) 99.533,101.6 cw(c99.533,102.083) RC613.1@99.191,101.741 ; DC56.1@99.353,156.147 ccw(c98.396,157.104) 99.75,157.104 ; CC445.1@99.412,176.288 cw(c99.924,175.776) 99.924,176.5 cw(c99.924,177.224) CC445.1@99.412,176.712 ; DC56.1@99.5,156 99.75,156.25 v1@99.75,159.5 ; 99.517,159.7 ccw(c99.517,160.233) v1@99.894,159.856 ; 99.75,158.784 cw(c100.966,158.784) v1@100.106,159.644 ; 99.867,101.6 ccw(c99.867,102.288) QC51.2@100.353,101.802 ; CC424.1@100.267,176.5 ccw(c100.267,177.433) CC424.1@100.927,176.773 ; QC51.2@100.5,101.655 100.845,102 103.85,102 RC612.1@104.25,101.6 104.25,102.5 ; QC51.2@100.647,101.508 cw(c101.833,100.322) 101.833,102 ; CC424.1@100.8,176.9 RC653.2@102.25,176.9 105.6,176.9 105.85,176.65 RC515.2@105.85,175.75 ; CC424.1@100.927,177.127 ccw(c101.474,177.674) 101.474,176.9 ; RC653.2@102.059,176.759 ccw(c101.717,176.417) 101.717,176.9 ccw(c101.717,177.383) RC653.2@102.059,177.041 ; v1(102.25,202) 103.5,202 RC194.2@104.2,202.7 ; RC653.2@102.441,176.759 cw(c102.783,176.417) 102.783,176.9 cw(c102.783,177.383) RC653.2@102.441,177.041 ; 102.751,102 cw(c102.751,100.151) RC612.1@104.059,101.459 ; v1(103.1,209.4) RC103.2@106.25,209.4 ; RC9.1@103.35,137.25 v1(104.75,137.25) ; RC13.1@103.35,148.25 v1(104.5,148.25) ; NTCC1.2@103.376,190.646 cw(c102.523,189.793) 103.73,189.793 cw(c104.937,189.793) NTCC1.2@104.084,190.646 ; RC9.1@103.491,137.109 cw(c103.833,136.767) 103.833,137.25 cw(c103.833,137.733) RC9.1@103.491,137.391 ; RC13.1@103.491,148.109 cw(c103.833,147.767) 103.833,148.25 cw(c103.833,148.733) RC13.1@103.491,148.391 ; NTCC1.2@103.73,191 103.73,189.27 105,188 RC629.1@107.4,188 ; RC612.1@103.75,102 104.25,102.5 ; RC194.2@103.773,202.273 ccw(c103.346,202.7) RC194.2@103.95,202.7 ; RC612.1@103.959,102 cw(c103.959,101.359) RC612.1@104.412,101.812 ; 104.026,209.4 ccw(c104.026,210.174) CC49.1@104.573,209.627 ; CND7.10@104.063,253.887 ccw(c103.082,254.868) 104.47,254.868 ccw(c105.858,254.868) CND7.10@104.877,253.887 ; CND7.9@104.063,255.613 cw(c103.082,254.632) 104.47,254.632 cw(c105.858,254.632) CND7.9@104.877,255.613 ; RC612.1@104.109,101.741 ccw(c103.767,102.083) 104.25,102.083 ccw(c104.733,102.083) RC612.1@104.391,101.741 ; CND7.10@104.11,253.032 cw(c103.505,252.28) 104.47,252.28 ; RC612.1@104.186,101.877 cw(c104.486,101.148) 105.044,101.706 ; v1(104.25,103.75) 104.25,102.5 ; CND7.9@104.47,256.02 CND7.10@104.47,253.48 104.47,252.28 ; 104.578,102.172 ccw(c105.421,103.015) QC50.2@105.701,101.856 ; v1(104.75,153) 105.75,152 CC93.1@106.7,152 ; CND7.10@104.83,253.032 ccw(c105.435,252.28) 104.47,252.28 ; CC49.1@104.927,209.627 ccw(c105.474,210.174) 105.474,209.4 ; 105.15,101.6 104.25,102.5 ; 105.208,101.542 ccw(c105.666,102.001) QC50.2@105.819,101.37 ; RC515.2@105.709,175.941 ccw(c105.367,176.283) 105.85,176.283 ccw(c106.333,176.283) RC515.2@105.991,175.941 ; RC162.4@105.85,160.7 cw(c107.419,160.7) 106.31,161.81 ; RC103.2@106.059,209.259 ccw(c105.717,208.917) 105.717,209.4 ccw(c105.717,209.883) RC103.2@106.059,209.541 ; RC173.2@106.223,155.427 ccw(c106.65,155.854) RC173.2@106.65,155.25 ; CC93.1@106.523,151.823 ccw(c106.096,151.396) 106.096,152 ccw(c106.096,152.604) CC93.1@106.523,152.177 ; RC173.2@106.65,155 105.7,155.95 RC162.1@105.7,158.3 RC162.2@105.7,159.1 RC162.3@105.7,159.9 RC162.4@105.7,160.7 105.7,161.2 106.75,162.25 v1(109,162.25) ; RC629.1@107.259,187.859 ccw(c106.917,187.517) 106.917,188 ccw(c106.917,188.483) RC629.1@107.259,188.141 ; CC59.1@107.373,118.927 ccw(c106.826,119.474) 107.6,119.474 ; RC113.2@107.459,120.059 cw(c107.117,119.717) 107.6,119.717 cw(c108.083,119.717) RC113.2@107.741,120.059 ; CC12.2@107.55,133 108.05,133.5 v1(109.5,133.5) ccw(c109.5,131.449) CC12.2@107.985,132.831 ; CC59.1@107.6,118.8 RC113.2@107.6,120.25 RC198.1@110.4,120.25 CC101.1@110.4,118.8 ; RC26.2@107.6,131.5 CC12.2@107.6,132.95 ; RC26.2@107.6,131.914 cw(c108.886,131.914) CC12.2@107.977,132.823 ; CC12.2@107.6,132.636 ccw(c108.936,132.636) RC26.2@107.991,131.691 ; CC12.2@107.615,133.169 cw(c108.367,132.483) 108.367,133.5 ; CC23.2@107.623,144.927 ccw(c107.076,145.474) 107.85,145.474 ; RC31.2@107.709,146.059 cw(c107.367,145.717) 107.85,145.717 cw(c108.333,145.717) RC31.2@107.991,146.059 ; RC31.2@107.709,146.441 ccw(c107.367,146.783) 107.85,146.783 ccw(c108.333,146.783) RC31.2@107.991,146.441 ; RC113.2@107.741,120.109 cw(c108.083,119.767) 108.083,120.25 cw(c108.083,120.733) RC113.2@107.741,120.391 ; CC23.2@107.85,144.8 RC31.2@107.85,146.25 107.85,147.1 110.25,149.5 v1(110.75,149.5) ; CC204.2@109.123,230.073 cw(c108.214,229.164) 109.5,229.164 ; CC204.2@109.3,230.25 109.5,230.05 v1(109.5,228.75) ; v1(109.5,128.75) 109.5,129.5 110,130 CC34.2@110.95,130 ; v1(109.5,141.75) 109.5,142.5 110.25,143.25 CC35.2@110.7,143.25 ; 109.505,142.505 cw(c110.7,141.31) CC35.2@110.7,143 ; 109.64,148.89 cw(c110.75,147.781) v1@110.75,149.35 ; 110,149.25 cw(c110.423,148.827) v1@110.684,149.365 ; RC198.1@110.259,120.059 cw(c109.917,119.717) 110.4,119.717 cw(c110.883,119.717) RC198.1@110.541,120.059 ; RC198.1@110.259,120.109 ccw(c109.917,119.767) 109.917,120.25 ccw(c109.917,120.733) RC198.1@110.259,120.391 ; 110.4,119.474 ccw(c111.174,119.474) CC101.1@110.627,118.927 ; CC34.2@110.773,129.823 ccw(c110.346,129.396) 110.346,130 ccw(c110.346,130.604) CC34.2@110.773,130.177 ; CC84.1@112.623,161.073 cw(c112.196,160.646) 112.8,160.646 cw(c113.404,160.646) CC84.1@112.977,161.073 ; 112.682,234 cw(c112.682,233.042) RC368.1@113.595,233.33 ; RC170.1@112.704,156.712 cw(c112.981,156.216) 113.382,156.618 ; v1(112.707,247.793) 109.325,251.175 105.575,251.175 104.47,252.28 ; CC94.1@112.8,153.25 v1(114,153.25) cw(c114,154.69) CC94.1@112.978,153.676 ; RC170.1@112.8,156.55 CC84.1@112.8,161.25 ; 112.8,157.154 ccw(c113.454,157.154) RC170.1@112.991,156.691 ; RC170.1@112.843,156.75 cw(c112.864,155.819) 113.523,156.477 ; RC170.1@112.85,156.5 113.5,156.5 v1(114,156) ; RC170.1@112.948,156.275 cw(c113.316,155.616) v1@113.85,156.15 ; RC170.1@112.991,156.359 cw(c113.333,156.017) 113.333,156.5 cw(c113.333,156.983) RC170.1@112.991,156.641 ; RC368.1@113.119,233.18 ccw(c112,232.827) v1(112,234) 112.75,234 RC368.1@113.45,233.3 ; CC67.1@114.373,210.823 cw(c113.946,210.396) 114.55,210.396 cw(c115.154,210.396) CC67.1@114.727,210.823 ; RC142.2@114.55,209.55 CC67.1@114.55,211 ; 114.55,210.154 ccw(c115.204,210.154) RC142.2@114.741,209.691 ; RC142.2@114.75,209.25 v1(115.5,208.5) ; RC142.2@114.8,209.45 ccw(c115.404,209.45) RC142.2@114.977,209.023 ; RC358.4@116.2,159.45 RC358.3@116.2,158.65 RC358.2@116.2,157.85 RC358.1@116.2,157.05 RC365.4@116.2,155.7 RC365.3@116.2,154.9 RC365.2@116.2,154.1 RC365.1@116.2,153.3 v1(117.5,152) ; RC365.1@116.35,153.3 ccw(c116.712,153.3) 116.456,153.044 ; RC605.2@116.5,105.4 117.4,105.4 117.75,105.75 117.75,108.1 v1(116.8,109.05) ; RC605.2@116.691,105.259 cw(c117.033,104.917) 117.033,105.4 cw(c117.033,105.883) RC605.2@116.691,105.541 ; RC481.2@117.009,211.559 cw(c116.546,211.096) 117.2,211.096 ; RC481.2@117.009,211.941 ccw(c116.546,212.404) 117.2,212.404 ; RC472.2@117.009,215.559 cw(c116.546,215.096) 117.2,215.096 ; CC281.2@117.023,210.427 ccw(c116.596,210.854) 117.2,210.854 ccw(c117.804,210.854) CC281.2@117.377,210.427 ; CC274.2@117.023,213.073 cw(c116.596,212.646) 117.2,212.646 cw(c117.804,212.646) CC274.2@117.377,213.073 ; CC274.2@117.023,213.427 ccw(c116.596,213.854) 117.2,213.854 ccw(c117.804,213.854) CC274.2@117.377,213.427 ; CC281.2@117.2,210.25 CC274.2@117.2,213.25 117.2,215.25 ; v1(120.75,166) 121.5,166 122.25,165.25 ; RC512.1@122.459,153.191 ccw(c122.117,153.533) 122.6,153.533 ccw(c123.083,153.533) RC512.1@122.741,153.191 ; RC510.1@122.459,155.309 cw(c122.117,154.967) 122.6,154.967 cw(c123.083,154.967) RC510.1@122.741,155.309 ; CC227.2@122.55,164 122.25,164.3 122.25,165.25 ; RC512.1@122.6,153 RC510.1@122.6,155.5 ; RC510.1@122.6,155.55 RC510.1@122.6,155.5 ; RC510.1@122.6,155.75 ccw(c122.6,156.354) RC510.1@123.027,155.927 ; CC227.2@122.719,164.184 cw(c123.695,165.25) 122.25,165.25 ; v1(124.5,204) RC454.2@125.65,204 CC267.2@125.65,202.55 ; v1(124.5,214) RC499.2@125.65,214 ; v1@124.591,211.75 RC491.2@125.65,211.75 CC284.2@125.65,210.3 ; v1@124.606,211.623 cw(c124.912,211.317) 124.912,211.75 ; RC454.2@125.509,203.809 cw(c125.167,203.467) 125.65,203.467 cw(c126.133,203.467) RC454.2@125.791,203.809 ; RC454.2@125.509,203.859 ccw(c125.167,203.517) 125.167,204 ccw(c125.167,204.483) RC454.2@125.509,204.141 ; RC491.2@125.509,211.559 cw(c125.167,211.217) 125.65,211.217 cw(c126.133,211.217) RC491.2@125.791,211.559 ; RC491.2@125.509,211.609 ccw(c125.167,211.267) 125.167,211.75 ccw(c125.167,212.233) RC491.2@125.509,211.891 ; RC499.2@125.509,213.859 ccw(c125.167,213.517) 125.167,214 ccw(c125.167,214.483) RC499.2@125.509,214.141 ; RC499.2@125.509,214.191 ccw(c125.046,214.654) 125.7,214.654 ; CC289.2@125.523,215.323 cw(c125.096,214.896) 125.7,214.896 cw(c126.304,214.896) CC289.2@125.877,215.323 ; CC321.2@125.573,158.523 cw(c125.146,158.096) 125.75,158.096 cw(c126.354,158.096) CC321.2@125.927,158.523 ; 125.65,203.224 ccw(c126.424,203.224) CC267.2@125.877,202.677 ; 125.65,210.974 ccw(c126.424,210.974) CC284.2@125.877,210.427 ; RC499.2@125.7,214.05 CC289.2@125.7,215.5 ; CC321.2@125.75,158.7 125.75,157.5 ; 126.55,158.3 125.75,157.5 ; 35.5,181 36.25,181 ; 36.25,180.5 36.25,181 ; 46,99.8 46,100.25 ; CC301.2@51.5,181.55 52.8,181.55 CC147.1@53.25,182 ; 57.69,221.44 58.55,222.3 ; RC510.1@122.6,155.5 123.6,156.5 125.25,156.5 125.75,157 125.75,157.5 ; CC429.1@92.994,159.644 ccw(c93.563,159.513) 93.15,159.1 cw(c93.563,159.513) CC429.1@92.994,159.644 ; 122.25,164.75 ccw(c122.786,164.75) 122.625,164.238 cw(c122.786,164.75) 122.25,164.75
  Bottom Layer w1: v1(13.25,154.75) CC31.2@16.95,154.75 RC54.2@16.95,156.2 ; 15,162.646 cw(c15.804,162.646) CC270.1@15.235,163.215 ; CC270.1@15,162.966 ccw(c16.466,162.966) v1@15.429,161.929 ; CC270.1@15,163.25 15,162.5 ; v1@15.478,161.902 cw(c15.612,162.5) 15,162.5 ; v1(15.5,162) 15,162.5 ; RC369.1@21.2,233.75 21.31,233.75 26.45,233.75 ; CC269.2@22.55,183.25 22.55,184.55 22.9,184.9 RC467.1@24.25,184.9 24.25,183.3 CC345.2@24.2,183.25 ; 23.844,233.75 ccw(c23.844,237.456) CC328.2@26.465,234.835 ; 25.55,235.2 ccw(c26.5,235.2) CC328.2@25.998,234.393 ; CC203.2@25.55,237.25 25.55,239.3 26.5,240.25 CC236.2@26.5,240.95 ; 25.743,233.75 cw(c25.743,232.043) CC201.2@26.95,233.25 ; 25.775,235.475 ccw(c26.35,236.05) CC328.2@26.491,235.249 ; 26.005,239.755 ccw(c24.81,240.95) CC236.2@26.5,240.95 ; CC328.2@26.5,234.336 ccw(c28.036,234.336) CC201.2@26.95,233.25 ; CC328.2@26.526,235.242 cw(c27.62,237) 25.55,237 25.55,235.7 26.5,234.75 26.5,233.7 CC201.2@26.95,233.25 ; v1(26.75,96.25) 27.75,95.25 29.65,95.25 RA163.1@29.65,96.75 ; CC236.2@26.95,240.5 CC339.2@28.25,240.5 ; CC339.2@27.586,240.5 cw(c27.586,242.036) CC236.2@26.5,240.95 ; RA163.1@29.7,96.95 CA112.1@29.7,98.25 ; QC10.3@34.31,235.468 RC354.1@37.25,235.468 ; 35.629,235.468 cw(c35.629,233.679) RC354.1@36.894,234.944 ; JC1.1@37,132.27 39.03,134.3 DC58.1@40.5,134.3 40.5,134.155 QC52.2@42.5,132.155 ; RC354.1@37.25,235.05 37.25,232.5 v1(38,231.75) ; QA13.1@40.5,95.5 40.35,95.65 RA188.1@40.35,97 41.95,97 CA122.1@42,96.95 ; CC160.1@46.8,188.25 CC158.1@46.8,186 48.05,186 CC305.1@48.5,185.55 ; CC120.2@46.8,190.5 v1(48.5,190.5) ; CC119.2@46.8,193.25 v1(48.5,193.25) ; CC118.2@46.8,197 46.8,198.25 ; 46.8,197.55 47.5,198.25 ; 46.8,198.95 47.5,198.25 ; CC124.2@46.8,199.5 46.8,198.25 ; CC117.2@46.8,202.343 cw(c48.457,202.343) CC107.2@47.285,203.515 ; CC107.2@47.25,203.75 46.8,203.3 CC117.2@46.8,202 v1(48,202) ; CC107.2@47.35,203.85 RC217.1@47.35,206.5 ; 47.414,186 cw(c47.414,184.464) CC305.1@48.5,185.55 ; v1(48.75,198.25) 47.5,198.25 ; v1(50,188) CC308.1@51.75,188 ; CC304.2@50.343,185.55 ccw(c50.343,187.207) CC303.1@51.515,186.035 ; CC131.2@50.5,204.45 CC115.2@52,204.45 ; CC303.1@51.5,186 51.05,185.55 CC305.1@48.5,185.55 ; CC303.1@51.75,186 CC308.1@51.75,187.75 ; v1(51.8,171.05) 51.8,173.8 CC150.1@52,174 ; v1(52.25,202.5) CC115.2@52.25,204.45 ; v1(55.75,202.25) CC130.2@55.75,204.45 ; CA77.1@55.8,111.2 cw(c58.297,111.2) CA78.2@56.533,112.967 ; CA77.1@55.8,111.25 55.8,112.8 CA78.2@56.25,113.25 ; CC157.1@57,185.55 60.55,185.55 ; v1(58.25,202.5) CC114.2@58.25,204.45 ; CC114.2@58.5,204.45 CC113.2@62.25,204.45 CC129.2@64,204.45 CC112.2@65.75,204.45 ; CC125.2@60.25,182.05 CC109.1@65.05,182.05 ; CC299.2@60.343,185.55 ccw(c60.343,187.207) CC300.2@61.515,186.035 ; 60.526,185.526 cw(c61.55,184.501) CC300.2@61.55,185.95 ; 60.75,185.75 60.75,187.5 ccw(c62.448,187.5) CC300.2@61.576,186.043 ; CC309.1@60.75,187.361 cw(c58.189,187.361) CC299.2@60,185.55 ccw(c60,186.878) 60.939,185.939 ; CC309.1@60.75,188 v1(60.75,189.75) ; RC93.8@60.8,199.95 RC93.7@61.6,199.95 RC93.6@62.4,199.95 RC93.5@63.2,199.95 63.95,199.95 ; 61,186 60.55,185.55 ; CC300.2@61.51,186.03 cw(c60.55,186.75) 60.55,185.55 ; CC108.1@63.75,182.05 69.2,182.05 RC514.2@69.4,182.25 ; 63.975,199.975 cw(c64.437,199.513) RC231.7@64.62,200.14 ; 64.3,200.3 RC231.8@64.7,200.7 ; RC231.7@64.457,199.842 cw(c65.347,200.053) RC231.8@64.7,200.7 ; RC222.5@64.7,189.55 RC222.6@64.7,190.35 RC222.7@64.7,191.15 RC222.8@64.7,191.95 ; RC224.5@64.7,193.8 RC224.6@64.7,194.6 RC224.7@64.7,195.4 RC224.8@64.7,196.2 ; RC231.5@64.7,198.3 RC231.6@64.7,199.1 RC231.7@64.7,199.9 RC231.8@64.7,200.7 ; CC109.1@65.735,182.535 ccw(c66.907,183.707) CC297.1@66.907,182.05 ; CC109.1@66.093,182.05 ccw(c66.093,183.707) CC297.1@67.265,182.535 ; CC297.1@67.5,182.5 v1(67.5,184.25) ; CC297.1@67.735,182.535 ccw(c68.907,183.707) 68.907,182.05 ; v1(68.25,202.5) 69.45,201.3 CC111.2@69.45,201 ; CC123.2@69,186.336 ccw(c70.536,186.336) CC126.2@69.45,185.25 ; CC123.2@69,187.664 cw(c70.536,187.664) CC122.2@69.45,188.75 69,188.3 CC123.2@69,187 69,185.7 CC126.2@69.45,185.25 ; 69.238,201.512 cw(c68.726,201) CC111.2@69.45,201 ; RC513.2@69.45,180.8 CC296.2@69.45,183.75 CC126.2@69.45,185.25 ; CC116.2@69.45,192.75 CC127.2@69.45,191.25 CC111.2@69.45,201 ; v1(72.5,234) RC370.1@72.5,235.3 73.733,235.3 QC22.3@74.468,236.035 cw(c73.017,237.486) RC370.1@72.768,235.449 ; RC389.1@72.5,241.8 74.203,241.8 QC38.3@74.468,241.535 ; RC370.1@72.62,235.3 ccw(c72.62,237.705) QC22.3@74.32,236.005 ; v1@73.75,240.368 cw(c75.411,240.368) QC38.3@74.261,241.566 ; v1(73.75,240.5) 73.75,241.347 ; 73.753,241.8 cw(c73.753,240.998) QC38.3@74.32,241.565 ; 75.836,228.25 cw(c75.836,229.786) CC226.2@74.75,228.7 75.2,228.25 CC335.2@76.75,228.25 CC338.2@82.5,228.25 ; 79.414,228.25 ccw(c79.414,229.786) CC235.2@80.5,228.7 ccw(c81.586,229.786) 81.586,228.25 ; RC357.1@80.45,241.8 82.703,241.8 QC13.3@82.968,241.535 ; RC378.1@80.75,235.3 82.233,235.3 QC30.3@82.968,236.035 ; RC378.1@81.12,235.3 ccw(c81.12,237.705) QC30.3@82.82,236.005 ; v1(81.75,227) 81.75,228.25 ; 82.253,241.8 cw(c82.253,240.998) QC13.3@82.82,241.565 ; CC340.2@87.5,233.25 89.2,233.25 89,233.45 RC387.1@89,235.3 90.233,235.3 QC35.3@90.968,236.035 cw(c89.517,237.486) RC387.1@89.268,235.449 ; 89,233.904 ccw(c89.854,233.904) CC244.2@89.25,233.3 ; RC367.1@89,241.8 90.703,241.8 QC19.3@90.968,241.535 ; RC387.1@89.12,235.3 ccw(c89.12,237.705) QC35.3@90.82,236.005 ; 90.253,241.8 cw(c90.253,240.998) QC19.3@90.82,241.565 ; CC354.2@93.8,165.05 CC436.1@93.8,166.75 ; CC329.2@95.8,233 CC205.2@97.5,233 ; CC329.2@96.165,233.035 ccw(c94.148,235.052) RC355.1@97,235.052 ; 97,233 RC355.1@97,235.3 ; v1@97,234.584 cw(c98.216,234.584) RC355.1@97.356,235.444 ; 97,234.861 ccw(c99.561,234.861) CC205.2@97.75,233.05 ; RC355.1@97.5,235.55 98.983,235.55 QC11.3@99.468,236.035 ; RC376.1@97.5,241.8 QC28.3@99.203,241.8 ; RC355.1@98.223,235.55 ccw(c98.223,237.102) QC11.3@99.32,236.005 ; v1@98.65,240.5 cw(c100.454,240.5) QC28.3@99.178,241.776 ; v1@98.668,240.443 cw(c99.251,240.846) 98.75,241.347 ; v1@98.75,240.368 cw(c100.411,240.368) QC28.3@99.261,241.566 ; v1(98.75,240.5) 98.75,241.347 ; 98.753,241.8 cw(c98.753,240.998) QC28.3@99.32,241.565 ; QC28.3@99.468,241.535 QC28.3@99.203,241.8 ; CC209.2@103.5,232.95 105.05,232.95 CC330.2@105.75,232.25 105.75,235.05 RC356.1@105.5,235.3 106.733,235.3 QC12.3@107.468,236.035 cw(c106.017,237.486) RC356.1@105.768,235.449 ; CC209.2@103.739,232.95 cw(c103.739,230.439) CC330.2@105.515,232.215 ; RC612.1@104.65,101.6 QC50.2@105.695,101.6 ; RC377.1@105.5,241.8 107.203,241.8 QC29.3@107.468,241.535 ; RC356.1@105.62,235.3 ccw(c105.62,237.705) QC12.3@107.32,236.005 ; RAC2.8@105.8,169.8 RAC2.7@105.8,170.6 RAC2.6@105.8,171.4 RAC2.5@105.8,172.2 106.25,172.65 106.25,175.35 RC515.2@105.85,175.75 ; RC515.2@105.885,175.735 cw(c105.005,174.855) 106.25,174.855 ; v1@106.75,240.368 cw(c108.411,240.368) QC29.3@107.261,241.566 ; v1(106.75,240.5) 106.75,241.347 ; 106.753,241.8 cw(c106.753,240.998) QC29.3@107.32,241.565 ; CC341.2@112.25,231.5 113.45,231.5 CC245.2@113.75,231.8 ; CC341.2@112.469,231.546 ccw(c112.92,232.63) CC245.2@113.75,231.8 ; v1(112.77,99.5) 114.405,99.5 QC49.2@114.75,99.845 ; 113.75,232.154 ccw(c114.604,232.154) CC245.2@114,231.55 ; RC388.1@113.75,238.8 114.265,238.285 QC36.3@115.718,238.285 115.5,238.503 v1(115.5,240) ; 114.02,99.5 ccw(c114.02,100.575) QC49.2@114.78,99.815 ; RC388.1@114.106,238.906 ccw(c115.606,240.406) QC36.3@115.606,238.285 ; QC20.3@115.718,235.035 113.983,233.3 RC368.1@113.75,233.3 CC245.2@113.75,231.8 ; QC14.2@122.655,161 CC227.2@122.655,163.895 ; CC327.2@126,168.05 127.8,168.05 128.52,168.77 CNC10.9@130.23,168.77 CNC10.10@132.77,168.77 ; 126.716,158.3 cw(c126.716,159.666) CC321.2@125.75,158.7 126.15,158.3 129.92,158.3 CNC10.17@130.23,158.61 CNC10.18@132.77,158.61 ; 127.196,168.05 ccw(c127.196,168.854) CC326.1@127.765,168.285 ; CC322.1@127.319,153.05 cw(c127.319,155.269) CC323.2@125.75,153.7 126.4,153.05 129.75,153.05 CNC10.21@130.23,153.53 CNC10.22@132.77,153.53 ; CC326.1@128.235,168.215 cw(c129.576,166.874) CNC10.9@129.576,168.77 ; 46.8,198.25 47.5,198.25 ; 98.75,241.347 QC28.3@99.203,241.8 ; CC108.1@64.093,182.05 ccw(c64.093,183.707) 65.265,182.535 cw(c64.093,183.707) CC108.1@64.093,182.05 ; CC322.1@128.287,153.05 ccw(c128.287,155.473) 130,153.76 cw(c128.287,155.473) CC322.1@128.287,153.05 ; 128.697,158.3 ccw(c128.697,160.143) 130,158.84 cw(c128.697,160.143) 128.697,158.3
  other v1: 43,89 43.75,89 44.5,89 43,89.75 43.75,89.75 44.5,89.75 66.25,113.5 109,120.25 122.143,133.143 41,135.75 35.5,140.25 35.5,143.5 94.05,143.75 72.6,145 125.25,149.25 31.05,157.25 87.25,157.75 96.5,158 94,168 99.75,168 101.25,168 37.5,176.25 109,177.5 109,178.75 79.75,189.5 74.8,196.25 114,196.25 18.5,206.25 124.5,211.729 117.2,214.5 65.05,228.5 97,234.25 123.75,235.75 122.05,236.5 74.5,238.25 90.25,248.8 111.715,248.785 36,251.25 37.25,251.25 38.5,251.25 39.75,251.25 41,251.25 38.5,252.25 39.75,252.25 41,252.25
  other v2: 49.25,102.5 50.5,102.5 51.75,102.5 53,102.5 49.25,103.75 50.5,103.75 51.75,103.75 53,103.75 30.75,105.5 32.25,105.5 33.75,105.5 35,105.5 33.75,106.75 35,106.75 47.25,109.75 47.25,111.25 47.25,112.5
  other v3: 95.75,171.75 97,171.75 98.25,171.75 99.5,171.75 95.75,173 97,173 98.25,173 99.5,173 57.25,190.75 58.75,190.75 60.25,190.75 62,190.75 57.25,192.25 58.75,192.25 60.25,192.25 62,192.25 57.25,193.75 58.75,193.75 60.25,193.75 62,193.75 57.25,195.25 58.75,195.25 60.25,195.25 62,195.25 57.25,196.75 58.75,196.75 60.25,196.75 62,196.75 57.25,198.25 58.75,198.25 60.25,198.25 62,198.25
  other v4: 33.75,108.25 35.25,108.25 36.75,108.25 38.25,108.25 39.75,108.25 41.25,108.25 42.75,108.25 44.25,108.25 45.75,108.25 33.75,109.75 35.25,109.75 36.75,109.75 38.25,109.75 39.75,109.75 41.25,109.75 42.75,109.75 44.25,109.75 45.75,109.75